# EAGLE board Display (EAGLE 7.2.0)
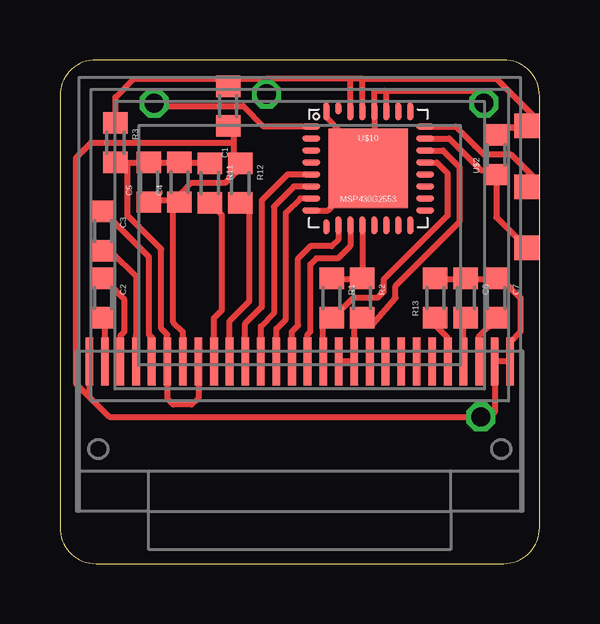
[diagram p0: board, top side]
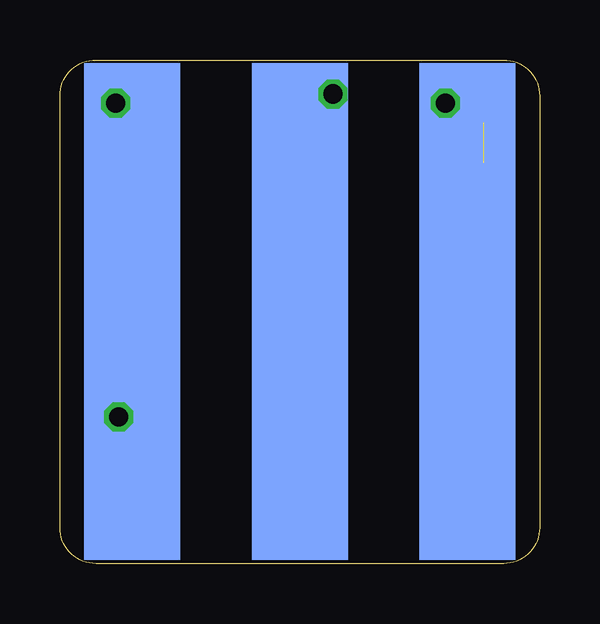
[diagram p1: board, bottom side, seen from below]

Size 20 x 21 mm. Coordinates in mm from the lower left corner, seen from the top.
Copper layers (1*16): Top 0.035mm / dielectric 1.5mm / Bottom 0.035mm
Design rules "Bilex DRU *": minimum track width 10mil, minimum drill 24mil, track to track 10mil, track to pad 10mil, pad to pad 10mil, via to via 10mil, smd to smd 10mil, copper to edge 1mil, drill to drill 8mil, minimum pad ring 10mil, minimum via ring 8mil, stop-mask expansion 4mil, vias tented up to drill 0mil, thermal gap 10mil

## Footprints (pad centres in the part's own frame; a part is rotated, then mirrored left to right if it is on the bottom)
603 = smd 0.889 x 1.016: 1 -0.826,0; 2 0.826,0
CARRIER_SMD2_WIDE_3POL = smd 4 x 20.7 bottom: GND -6.985,3.493; RX/TX 6.985,3.493; VCC 0,3.493 | smd 1.016 x 1.016: RST -9.461,0.826; TST -9.461,-1.714; VCC'' -9.461,-4.255
OLED_DISPLAY = smd 0.32 x 2: P$1 -8.775,-0.45; P$2 -8.125,-0.45; P$3 -7.475,-0.45; P$4 -6.825,-0.45; P$5 -6.175,-0.45; P$6 -5.525,-0.45; P$7 -4.875,-0.45; P$8 -4.225,-0.45; P$9 -3.575,-0.45; P$10 -2.925,-0.45; P$11 -2.275,-0.45; P$12 -1.625,-0.45; P$13 -0.975,-0.45; P$14 -0.325,-0.45; P$15 0.325,-0.45; P$16 0.975,-0.45; P$17 1.625,-0.45; P$18 2.275,-0.45; P$19 2.925,-0.45; P$20 3.575,-0.45; P$21 4.225,-0.45; P$22 4.875,-0.45; P$23 5.525,-0.45; P$24 6.175,-0.45; P$25 6.825,-0.45; P$26 7.475,-0.45; P$27 8.125,-0.45; P$28 8.775,-0.45
QFN32 = smd 0.762 x 0.254: 1 -2.375,1.75; 2 -2.375,1.25; 3 -2.375,0.75; 4 -2.375,0.25; 5 -2.375,-0.25; 6 -2.375,-0.75; 7 -2.375,-1.25; 8 -2.375,-1.75; 17 2.375,-1.75; 18 2.375,-1.25; 19 2.375,-0.75; 20 2.375,-0.25; 21 2.375,0.25; 22 2.375,0.75; 23 2.375,1.25; 24 2.375,1.75 | smd 0.254 x 0.635: 9 -1.75,-2.438 | smd 0.254 x 0.762: 10 -1.25,-2.375; 11 -0.75,-2.375; 12 -0.25,-2.375; 13 0.25,-2.375; 14 0.75,-2.375; 15 1.25,-2.375; 16 1.75,-2.375; 25 1.75,2.375; 26 1.25,2.375; 27 0.75,2.375; 28 0.25,2.375; 29 -0.25,2.375; 30 -0.75,2.375; 32 -1.75,2.375 | smd 0.254 x 0.508: 31 -1.25,2.5 | smd 3.302 x 3.302: TP 0,0

## Placement (x,y rotation side)
C1  100n  [603]  7.01,19.07 270 top
C2  1µ  [603]  1.81,11.07 270 top
C3  1µ  [603]  1.81,13.87 270 top
C4  1µ  [603]  4.98,15.9 90 top
C5  1µ  [603]  3.71,15.9 90 top
C6  4.7µ  [603]  16.92,11.07 270 top
C7  2.2µ  [603]  18.19,11.07 270 top
R1  4.7k  [603]  11.33,11.07 270 top
R2  4.7k  [603]  12.6,11.07 270 top
R3  0  [603]  2.31,17.55 270 top
R11  10k  [603]  6.25,15.87 270 top
R12  10k  [603]  7.52,15.87 270 top
R13  390k  [603]  15.65,11.07 90 top
U$1  CARRIER_SMD2SMD2_3POL_W  [CARRIER_SMD2_WIDE_3POL]  10,14 180 top
U$2  10k  [603]  18.19,17.05 90 top
U$6  OLED-64X48  [OLED_DISPLAY]  10,8.88 0 top
U$10  MSP430G2553  [QFN32]  12.86,16.48 0 top

## Library data of the parts
C1-C7 R1-R3 R11-R13 U$1 U$2 U$6 U$10 = thar

## Nets
GND: C1.2 C4.1 C5.1 C6.1 C7.1 R12.1 R13.2 U$1.GND U$6.P$1 U$6.P$7 U$6.P$27 U$6.P$28 U$10.8 U$10.27 U$10.28 U$10.32 U$10.TP
N$2: R1.2 U$6.P$16 U$10.21
N$3: U$1.TST U$10.24
N$4: U$1.RST U$2.1 U$10.23
N$5: U$6.P$11 U$10.5
N$6: U$6.P$12 U$10.6
N$7: R2.2 U$6.P$17 U$6.P$18 U$10.22
N$11: U$6.P$13 U$10.7
N$12: U$1.RX/TX U$10.1
N$13: R11.2 U$6.P$9
N$14: R12.2 U$6.P$10
N$16: R13.1 U$6.P$24
N$17: C2.2 U$6.P$2
N$18: C3.2 U$6.P$4
N$19: C3.1 U$6.P$5
N$20: C2.1 U$6.P$3
N$21: U$6.P$14 U$10.10
N$22: U$6.P$15 U$10.11
N$23: R1.1 R2.1 U$10.12
N$24: C7.2 U$6.P$26
N$25: C6.2 U$6.P$25
VCC: C1.1 C4.2 C5.2 R3.1 R3.2 R11.1 U$1.VCC U$1.VCC'' U$2.2 U$6.P$6 U$6.P$8 U$10.29 U$10.30

## Tracks (layer width: path | path; a pad name or v marks a point on that pad's centre or on a via)
GND  (via drill 0.8)
  Top 0.254: 13.38,16.16 12.88,17.19 13.12,17.17 | 13.38,16.16 13.43,16.13 U$10.TP 12.47,16.27 12.35,16.22 12.09,15.64 11.17,14.73 U$10.8 | U$10.32 11.11,18.61 11.71,18 12.34,17.81 13.11,17.55 | 13.11,17.55 U$10.28 13.11,19.71 13.5,19.71 | 13.11,17.55 13.11,16.87 13.38,16.16 | 6.92,18.35 7.01,18.32 | 7.01,18.32 C1.2 7.25,18.25 7.25,17.55 | 7.01,18.32 6.77,18.07 | v17.68,19.2 17.17,19.71 13.5,19.71 | U$10.27 13.61,19.69 13.5,19.71 | 16.92,11.84 C6.1 17.24,11.84 18,11.84 | 16.92,11.84 15.71,11.84 R13.2 | 18,11.84 18.19,12.03 C7.1 18.06,12.03 18,11.96 18,11.84 | 18,11.84 18.44,11.84 19.2,11.07 19.2,9.68 18.77,9.25 U$6.P$28 U$6.P$27 18.12,6.31 17.93,6.12 17.8,6.12 v17.55,6.12 2.06,6.12 1.23,6.96 | C5.1 3.77,15.14 4.85,15.14 C4.1 | U$6.P$1 1.23,6.96 | 1.23,6.96 0.66,7.52 0.66,16.91 1.3,17.55 7.25,17.55 | U$6.P$7 5.12,9.66 4.73,10.06 4.73,14.82 C4.1 | C4.1 4.98,15.37 5.48,15.87 6.89,15.87 7.39,16.38 R12.1 7.52,16.75 7.25,16.75 7.25,17.55 | 16.92,11.84 17.03,11.84 17.14,11.73
  Bottom 0.254: 17.08,11.26 U$1.GND 18.06,10.44 | 17.08,11.26 18,18.76 v17.68,19.2 | v17.55,6.12 17.55,11.2 | 17.55,11.2 17.3,11.45 | 17.55,11.2 17.14,11.2 17.08,11.26
N$2
  Top 0.254: U$10.21 15.71,16.73 16.16,16.28 16.16,14.5 13.49,11.84 13.49,11.33 13.24,11.07 12.22,11.07 11.59,10.44 R1.2 10.97,10.22 U$6.P$16
N$3
  Top 0.254: U$1.TST 19.71,16.15 18.82,17.05 17.68,17.05 17.3,17.43 16.92,17.8 16.5,18.23 U$10.24
N$4
  Top 0.254: U$2.1 18.19,14.45 U$1.RST | 18.06,16.16 17.87,16.28 U$2.1 | U$10.23 16.24,17.73 17.55,16.41 18.26,16.41 U$2.1
N$5
  Top 0.254: U$6.P$11 7.72,10.01 8.41,10.69 8.41,15.14 9.5,16.23 U$10.5
N$6
  Top 0.254: U$6.P$12 8.38,9.89 8.92,10.44 8.92,14.88 9.76,15.73 U$10.6
N$7
  Top 0.254: U$10.22 15.97,17.23 16.66,16.53 16.66,14.25 14,11.58 14,11.07 13.05,9.99 R2.2 12.28,10.19 U$6.P$18 U$6.P$17
N$11
  Top 0.254: U$6.P$13 9.03,9.78 9.43,10.18 9.43,14.63 10.02,15.23 U$10.7
N$12  (via drill 0.8)
  Top 0.254: 10.15,18.23 U$10.1 8.5,18.23 7.65,19.07 4.09,19.07 3.97,19.2 v3.93,19.2
  Bottom 0.254: v3.93,19.2 3.01,18.28 U$1.RX/TX
N$13
  Top 0.254: 6.17,15.12 R11.2 6.76,14.53 6.76,10.56 6.43,10.23 U$6.P$9
N$14
  Top 0.254: U$6.P$10 7.07,10.12 7.9,10.95 7.9,14.91 R12.2
N$16
  Top 0.254: U$6.P$24 16.18,9.4 15.65,9.93 R13.1
N$17
  Top 0.254: U$6.P$2 1.88,10.19 C2.2
N$18
  Top 0.254: U$6.P$4 3.17,9.52 3.2,9.55 3.2,11.96 2.19,12.98 1.87,12.98 C3.2
N$19
  Top 0.254: U$6.P$5 3.83,9.44 3.71,9.55 3.71,12.79 C3.1
N$20
  Top 0.254: U$6.P$3 2.53,9.51 2.7,9.68 2.7,11.01 C2.1
N$21
  Top 0.254: U$6.P$14 9.68,9.67 9.93,9.93 9.93,12.72 10.44,13.23 11.33,13.23 11.61,13.51 U$10.10
N$22
  Top 0.254: U$6.P$15 10.32,9.56 10.44,9.68 10.44,12.47 10.7,12.72 11.59,12.72 12.11,13.24 U$10.11
N$23
  Top 0.254: R1.1 11.52,11.84 12.47,11.84 R2.1 U$10.12
N$24
  Top 0.254: U$6.P$26 17.48,9.47 18.19,10.18 C7.2
N$25
  Top 0.254: U$6.P$25 16.82,10.15 C6.2
VCC  (via drill 0.8)  (1 unrouted)
  Top 0.254: 19.71,18.32 19.65,18.25 U$1.VCC'' 19.27,18.19 18.19,18.19 18.06,17.93 U$2.2 18.19,18.18 19.71,18.18 19.71,18.69 18.19,20.22 12.61,20.22 | 12.6,20.22 12.61,20.21 U$10.29 12.61,20.22 | 12.6,20.22 12.11,20.22 | 12.11,20.22 8.62,20.22 | 7.33,20.22 C1.1 6.82,20.22 | U$10.30 12.11,20.22 | 12.61,20.22 12.6,20.22 | 8.62,20.22 v8.62,19.58 | C4.2 4.98,16.53 4.85,16.66 4.85,16.69 | 2.82,16.69 2.82,14.5 4.22,13.11 4.22,9.8 4.47,9.55 U$6.P$6 4.47,6.88 4.73,6.63 5.49,6.63 5.78,6.91 U$6.P$8 | C5.2 3.65,16.66 3.62,16.66 3.58,16.69 | 7.33,20.22 3.08,20.22 2.31,19.45 R3.1 | 7.33,20.22 8.62,20.22 | 6.25,16.66 R11.1 4.85,16.69 | 2.31,16.53 R3.2 2.31,16.69 2.82,16.69 | 4.85,16.69 3.58,16.69 | 3.58,16.69 2.82,16.69
  Bottom 0.254: U$1.VCC 10,18.2 v8.62,19.58